# EAGLE board Mergen Ground Station_V2.0 (EAGLE 9.6.2)
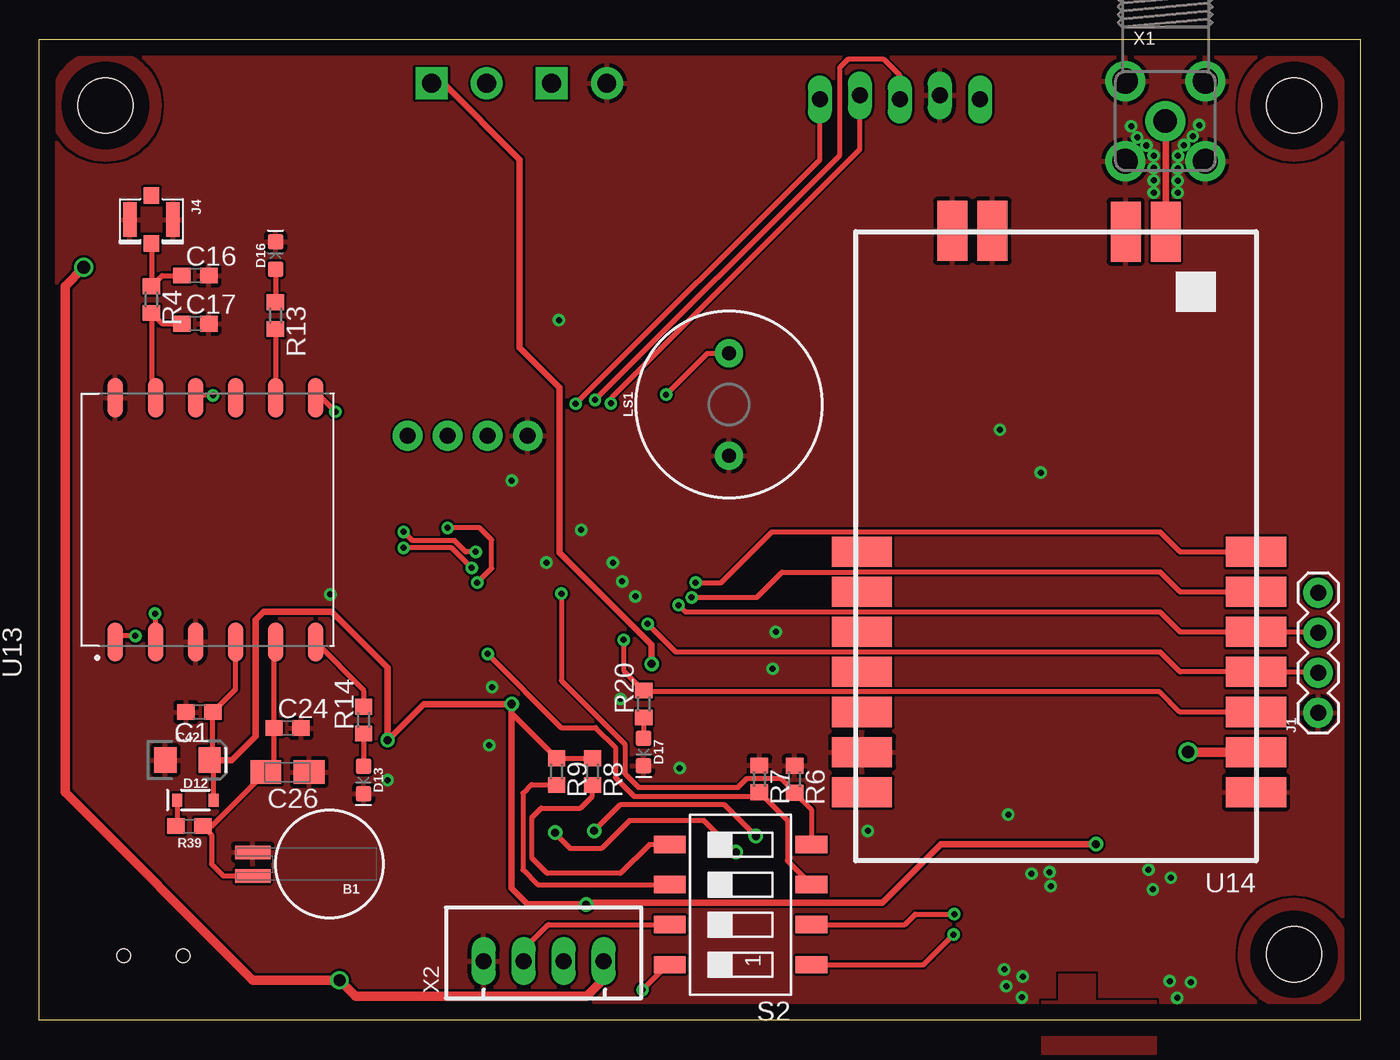
[diagram p0: board, top side]
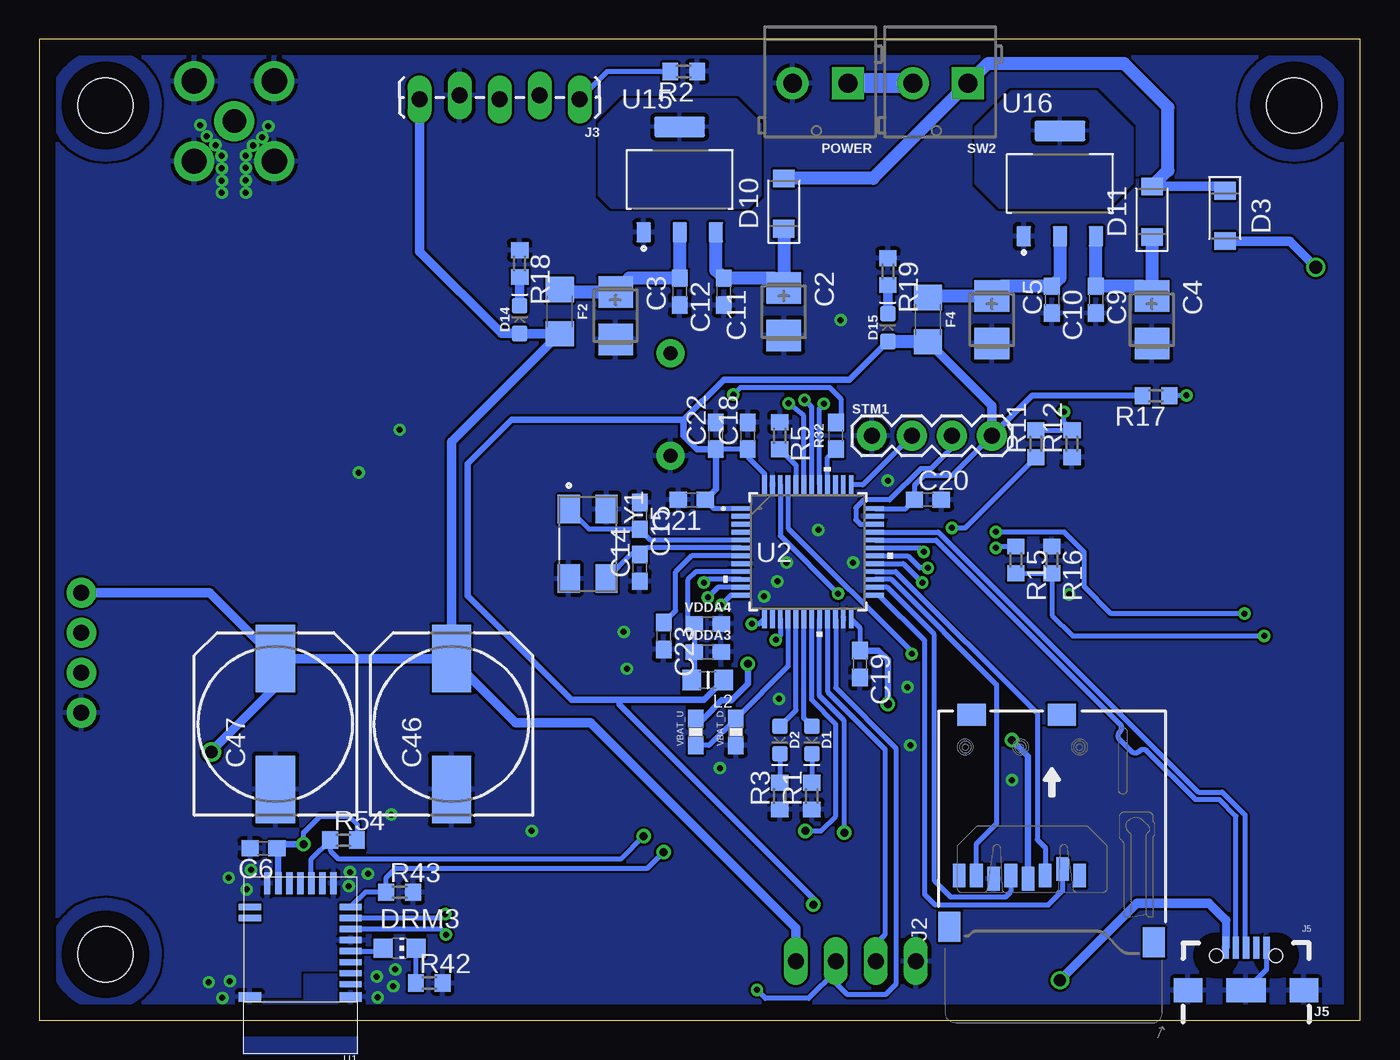
[diagram p1: board, bottom side, seen from below]

Size 83.82 x 62.23 mm. Coordinates in mm from the lower left corner, seen from the top.
Outline: 0,62.23 83.82,62.23 83.82,0 0,0 0,62.23
Copper layers (1*16): Top 0.035mm / dielectric 1.5mm / Bottom 0.035mm
Design rules "default": minimum track width 6mil, minimum drill 0.35mm, track to track 6mil, track to pad 6mil, pad to pad 6mil, via to via 6mil, smd to smd 6mil, copper to edge 40mil, drill to drill 6mil, minimum pad ring 10mil, minimum via ring 8mil, stop-mask expansion 4mil, vias tented up to drill 0mil, thermal gap 10mil
Holes 3.5 mm at 4.19,58.04 79.63,58.04 79.63,4.19

## Footprints (pad centres in the part's own frame; a part is rotated, then mirrored left to right if it is on the bottom)
BATTCON-6.8MM = smd 2.25 x 0.85: + 4.87,0.75; - 4.87,-0.75
C0603 = smd 1.1 x 1: 1 -0.85,0; 2 0.85,0
CT3528 = smd 2 x 2.2: + -1.5,0; - 1.5,0
A/3216-18R = smd 1.95 x 1.5: + 1.375,0; - -1.375,0
EIA3216 = smd 1.4 x 1.6: + 1.4,0; - -1.4,0
150CLZ-1010 = smd 4.3 x 2.5: + 4.15,0; - -4.15,0
LED-0603 = smd 1 x 1: A -0.877,0; C 0.877,0
SODFL3718X115 = smd 1.115 x 1.361: 1 -1.6,0; 2 1.6,0
SOD-323 = smd 0.63 x 0.83: A 1.15,0; C -1.15,0
CHIP-LED0805 = smd 1.2 x 1.2: A 0,-1.05; C 0,1.05
1206 = smd 1.6 x 1.8: 1 -1.4,0; 2 1.4,0
1X04 = drill 1.016 pad 1.88: 1 0,0; 2 2.54,0; 3 5.08,0; 4 7.62,0
CON-SD-CARD_2908-05 = smd 0.8 x 1.5: 1 1.761,3.847; 2 0.669,4.253; 3 -0.423,3.847; 4 -1.515,3.644; 5 -2.607,3.847; 6 -3.7,3.644; 7 -4.792,3.847; 8 -5.884,3.847 | smd 1.397 x 1.905: GND@1 -6.5,0.6; GND@2 6.473,-0.389 | smd 1.803 x 1.397: GND@3 0.631,14.059; GND@4 -5.084,14.059
1X05_LOCK_LONGPADS = drill 1.016 long: 1 0,0; 2 2.54,-0.254; 3 5.08,0; 4 7.62,-0.254; 5 10.16,0
U.FL = smd 2.2 x 0.85: 1 0,1.375; 2 0,-1.375 | smd 1.05 x 1: FEED 1.525,0; NC -1.525,0
USB-AB-MICRO-SMD = smd 1.4 x 0.4: D+1 2.7,0; D-1 2.7,0.65; GND1 2.7,-1.3; ID1 2.7,-0.65; VBUS1 2.7,1.3 | smd 1.5 x 1.8: SHLD1 0,-3.68; SHLD2 0,3.68 | smd 1.5 x 2.5: SHLD3 0,0 | hole 0.85: 2.2,1.9; 2.2,-1.9
RC-MASTER-SMD_L0805MP = smd 1.2 x 1.3: 1 -1.016,0; 2 1.016,0
BUZZER-12MM = drill 0.9 pad 1.778: + 3.25,0; - -3.25,0
SCREWTERMINAL-3.5MM-2-NS = drill 1.2 pad 2.032 square: 1 0,0 | drill 1.2 pad 2.032: 2 3.5,0
R0603 = smd 1 x 1.1: 1 -0.85,0; 2 0.85,0
0603 = smd 1.1 x 1: 1 -0.85,0; 2 0.85,0
SMS-004 = smd 1.092 x 2.007: 1 -3.81,-4.496; 2 -1.27,-4.496; 3 1.27,-4.496; 4 3.81,-4.496; 5 3.81,4.496; 6 1.27,4.496; 7 -1.27,4.496; 8 -3.81,4.496
MDBT42T-AT = smd 0.4 x 1.4: ADC -1.5,-4.7; CTS 0.6,-4.7; FLASH-D -0.8,-4.7; GND@1 -2.2,-4.7; GND@2 2,-4.7; RTS -0.1,-4.7; VDD 1.3,-4.7 | smd 1.4 x 0.4: DCC 3.1,-3.2; DEC4 3.1,-2.5; IND -3.3,-0.4; NC@0 -3.3,1.7; NC@1 -3.3,1; RESET -3.3,0.3; RX -3.3,-2.5; TX -3.3,-1.8; UART-PD -3.3,-3.2; WAKE-UP -3.3,-1.1 | smd 1.4 x 0.6: GND@0 -3.3,2.5; GND@3 3.1,2.5
LQFP48-7X7MM = smd 1.194 x 0.305: 1 -4.25,2.75; 2 -4.25,2.25; 3 -4.25,1.75; 4 -4.25,1.25; 5 -4.25,0.75; 6 -4.25,0.25; 7 -4.25,-0.25; 8 -4.25,-0.75; 9 -4.25,-1.25; 10 -4.25,-1.75; 11 -4.25,-2.25; 12 -4.25,-2.75; 25 4.25,-2.75; 26 4.25,-2.25; 27 4.25,-1.75; 28 4.25,-1.25; 29 4.25,-0.75; 30 4.25,-0.25; 31 4.25,0.25; 32 4.25,0.75; 33 4.25,1.25; 34 4.25,1.75; 35 4.25,2.25; 36 4.25,2.75 | smd 0.305 x 1.194: 13 -2.75,-4.25; 14 -2.25,-4.25; 15 -1.75,-4.25; 16 -1.25,-4.25; 17 -0.75,-4.25; 18 -0.25,-4.25; 19 0.25,-4.25; 20 0.75,-4.25; 21 1.25,-4.25; 22 1.75,-4.25; 23 2.25,-4.25; 24 2.75,-4.25; 37 2.75,4.25; 38 2.25,4.25; 39 1.75,4.25; 40 1.25,4.25; 41 0.75,4.25; 42 0.25,4.25; 43 -0.25,4.25; 44 -0.75,4.25; 45 -1.25,4.25; 46 -1.75,4.25; 47 -2.25,4.25; 48 -2.75,4.25
XCVR_L86 = smd 2.5 x 1: 1 -7.75,6.35; 2 -7.75,3.81; 3 -7.75,1.27; 4 -7.75,-1.27; 5 -7.75,-3.81; 6 -7.75,-6.35; 7 7.75,-6.35; 8 7.75,-3.81; 9 7.75,-1.27; 10 7.75,1.27; 11 7.75,3.81; 12 7.75,6.35
E32-868T30S = smd 3.81 x 1.905: 3V3 12.3,5.08; AUX -12.7,7.62; GND@0 -12.7,12.7; GND@1 12.3,10.16; M0 -12.7,-2.54; M1 -12.7,0; PB0 12.3,-2.54; PB1 12.3,0; PB3 12.3,2.54; RST 12.3,12.7; RX -12.7,2.54; SWIM 12.3,7.62; TX -12.7,5.08; VCC -12.7,10.16 | smd 1.905 x 3.81: ANT -6.97,-22.86; GND@2 6.57,-22.91; GND@3 4.03,-22.91; GND@4 -4.43,-22.86
SOT229P700X180-4N = smd 0.93 x 1.31: 1 -2.29,-3.345; 2 0,-3.345; 3 2.29,-3.345 | smd 3.24 x 1.31: 4 0,3.345
0603-RES = smd 1.1 x 1: 1 -0.85,0; 2 0.85,0
SMA90_DIP = drill 1.5 pad 2.54: ANTENNA 0,0 | drill 1.6 pad 2.54: GND1 -2.54,2.54; GND2 2.54,2.54; GND3 -2.54,-2.54; GND4 2.54,-2.54
JST-XH-04-PACKAGE-LONG-PAD = drill 1.016 long: 1 -3.81,0; 2 -1.27,0; 3 1.27,0; 4 3.81,0
XTAL_ABMM2-8.000MHZ-E2-T = smd 1.8 x 1.4: 1 -2.2,-1.2; 2 2.2,-1.2; 3 2.2,1.2; 4 -2.2,1.2

## Placement (x,y rotation side)
B1  6.8MM_COIN_CELL  [BATTCON-6.8MM]  18.41,9.91 180 top
C1  100nF  [C0603]  10.16,19.56 180 top
C2  22uF  [CT3528]  36.58,44.96 270 bottom
C3  22uF  [CT3528]  47.24,44.7 270 bottom
C4  22uF  [CT3528]  13.21,44.45 270 bottom
C5  22uF  [CT3528]  23.37,44.45 270 bottom
C6  100nF  [C0603]  69.6,10.92 180 bottom
C9  100nF  [C0603]  16.76,45.72 270 bottom
C10  100nF  [C0603]  19.56,45.72 270 bottom
C11  100nF  [C0603]  40.39,46.23 270 bottom
C12  100nF  [C0603]  43.18,46.23 270 bottom
C14  15pF  [C0603]  45.72,28.7 90 bottom
C15  15pF  [C0603]  45.72,32 270 bottom
C16  0.1uF  [C0603]  9.91,47.24 0 top
C17  0.1uF  [C0603]  9.91,44.2 0 top
C18  100nF  [C0603]  38.86,37.08 90 bottom
C19  100nF  [C0603]  31.75,22.61 270 bottom
C20  100nF  [C0603]  27.43,33.02 0 bottom
C21  100nF  [C0603]  42.42,33.02 180 bottom
C22  4.7uF  [C0603]  40.89,37.08 90 bottom
C23  0.1uF  [C0603]  44.2,24.38 270 bottom
C24  100nF  [C0603]  15.75,18.54 0 top
C26  4.7uF  [A/3216-18R]  15.75,15.75 180 top
C42  10uF  [EIA3216]  9.4,16.51 0 top
C46  1000uF  [150CLZ-1010]  57.66,18.8 90 bottom
C47  1000uF  [150CLZ-1010]  68.83,18.8 90 bottom
D1  BLUE  [LED-0603]  34.8,17.78 270 bottom
D2  GREEN  [LED-0603]  36.83,17.78 270 bottom
D3  B5819W  [SODFL3718X115]  8.59,51.03 270 bottom
D10  B5819W  [SODFL3718X115]  36.58,51.82 90 bottom
D11  B5819W  [SODFL3718X115]  13.21,51.31 90 bottom
D12  0.5A/40V/420mV  [SOD-323]  9.91,13.97 0 top
D13  [LED-0603]  20.57,15.24 270 top
D14  [LED-0603]  53.34,44.45 90 bottom
D15  [LED-0603]  29.97,43.94 90 bottom
D16  [LED-0603]  14.99,48.51 90 top
D17  [LED-0603]  38.35,17.02 270 top
DRM3  kirmizi  [CHIP-LED0805]  60.96,4.57 270 bottom
F2  1A  [1206]  50.8,44.96 270 bottom
F4  0.75A  [1206]  27.43,44.45 270 bottom
J1  [1X04]  81.15,19.51 90 top
J2  CON-SD-CARD_MICROSD-2908-05  [CON-SD-CARD_2908-05]  19.56,5.33 0 bottom
J3  [1X05_LOCK_LONGPADS]  49.53,58.42 180 bottom
J4  U.FL  [U.FL]  7.11,50.8 270 top
J5  [USB-AB-MICRO-SMD]  7.24,1.9 90 bottom
L2  [RC-MASTER-SMD_L0805MP]  41.4,21.59 180 bottom
LS1  BUZZER-PTH  [BUZZER-12MM]  43.76,39.07 90 top
POWER  [SCREWTERMINAL-3.5MM-2-NS]  32.51,59.44 180 bottom
R1  1.5k  [R0603]  34.8,14.22 90 bottom
R2  10k  [R0603]  42.93,60.2 180 bottom
R3  1.5k  [R0603]  36.83,14.22 90 bottom
R4  0  [R0603]  7.11,45.72 270 top
R5  10k  [R0603]  36.83,37.08 270 bottom
R6  10k  [R0603]  47.93,15.29 270 top
R7  10k  [R0603]  45.69,15.32 270 top
R8  330  [R0603]  35.1,15.77 270 top
R9  330  [R0603]  32.82,15.77 270 top
R11  680  [R0603]  20.57,36.58 90 bottom
R12  10k  [R0603]  18.29,36.58 90 bottom
R13  100  [R0603]  14.99,44.7 270 top
R14  470  [R0603]  20.57,19.05 90 top
R15  680  [R0603]  21.84,29.21 270 bottom
R16  10k  [R0603]  19.56,29.21 270 bottom
R17  10k  [R0603]  12.95,39.62 180 bottom
R18  1.5k  [R0603]  53.34,48.01 270 bottom
R19  1k  [R0603]  29.97,47.5 270 bottom
R20  3.3k  [R0603]  38.35,20.07 90 top
R32  47  [0603]  33.27,37.08 90 bottom
R39  1k  [0603]  9.53,12.32 180 top
R42  470  [R0603]  59.08,2.36 0 bottom
R43  10k  [R0603]  60.96,8.13 0 bottom
R54  10k  [R0603]  64.52,11.43 0 bottom
S2  SWS004  [SMS-004]  44.5,7.34 90 top
STM1  [1X04]  30.99,37.08 0 bottom
SW2  [SCREWTERMINAL-3.5MM-2-NS]  24.89,59.44 180 bottom
U1  [MDBT42T-AT]  67.36,3.99 180 bottom
U2  [LQFP48-7X7MM]  35.05,29.72 0 bottom
U13  L86  [XCVR_L86]  11.18,31.75 90 top
U14  [E32-868T30S]  64.52,27.18 180 top
U15  AMS1117-5V  [SOT229P700X180-4N]  43.18,53.34 0 bottom
U16  AMS1117-3.3  [SOT229P700X180-4N]  19.05,53.09 0 bottom
VBAT_D  3.3k  [0603-RES]  39.62,18.29 90 bottom
VBAT_U  10k  [0603-RES]  42.16,18.29 90 bottom
VDDA3  1uF  [0603]  41.4,23.37 0 bottom
VDDA4  10nF  [0603]  41.4,25.15 0 bottom
X1  [SMA90_DIP]  71.45,57.05 0 top
X2  JST-XH-04-PIN-LONG-PAD  [JST-XH-04-PACKAGE-LONG-PAD]  32,3.76 0 top
Y1  ABMM2-8.000MHZ-E2-T  [XTAL_ABMM2-8.000MHZ-E2-T]  49.02,30.23 270 bottom

## Library data of the parts
B1 = SparkFun-Batteries; PROD_ID: BATT-13734
C1-C6 C9-C12 C14-C24 C26 = rcl; SPICEPREFIX: C
C42 = SparkFun-Capacitors; PROD_ID: CAP-00811
C46 C47 X1 = adafruit
D1 D2 D13-D17 = SparkFun-LED
D3 D10 D11 = Diode; CATEGORY: Diode; DESCRIPTION: DIODE SCHOTTKY 20V 500MA SOD123; MANUFACTURER: ON Semiconductor; MPN: MBR0520LT1G; SUB-CATEGORY: Schottky
D12 = SparkFun-DiscreteSemi; PROD_ID: DIO-10955
DRM3 = led
F2 F4 = SparkFun-Fuses; PROD_ID: RES-08585
J1 STM1 = SparkFun-Connectors; PROD_ID: CONN-09696
J2 L2 = 52101-101-REV-A_v16
J3 = SparkFun-Connectors
J4 = SparkFun-Connectors; PROD_ID: CONN-09193; SF_ID: WRL-09144
J5 = SparkFun-Connectors; PROD_ID: CONN-11794
LS1 = SparkFun-Electromechanical; PROD_ID: COMP-08253; SF_SKU: COM-07950
POWER SW2 = SparkFun-Connectors; PROD_ID: CONN-08399
R1-R5 R11-R20 = rcl; SPICEPREFIX: R
R6-R9 R42 R43 R54 = rcl
R32 = SparkFun-Resistors; PROD_ID: RES-08609
R39 = SparkFun-Resistors; PROD_ID: RES-07856
S2 = smd-special
U1 = ELTASSAN; COMPONENT: MODULE BLUETOOTH BT4.2/5 nRF52805 SOC CHIP ANTENNA; OZDISAN_NO: MDBT42T-AT
U2 = STM32F103C8T6; BUILT_BY: EMA_UL_Team; COPYRIGHT: Copyright (C) 2018 Accelerated Designs. All rights reserved; MANUFACTURER_PART_NUMBER: STM32F103C8T6; SOURCELIBRARY: Updates_to_database_2020-10-19; VENDOR: STMicroelectronics
U13 = L86; AVAILABILITY: Unavailable; DESCRIPTION: L86 is an ultra-compact GNSS POT (Patch on Top) module with an embedded 18.4mm × 18.4mm × 4.0mm patch antenna and utilizes the MediaTek new generation GNSS chipset MT3333 that achieves the perfect performance; MF: Quectel; MP: L86; PACKAGE: PowerSFN-8 Quectel; PRICE: None
U14 = E32-868T30S
U15 U16 = AMS1117-3.3; AVAILABILITY: Unavailable; DESCRIPTION: Sot223/Pkg 1-Amp 3.3-Volt Low Drop Out Voltage Regulatator; MF: Advanced Monolithic Systems; MP: AMS1117-3.3; PACKAGE: SOT-89 ams; PRICE: None
VBAT_D VBAT_U = SparkFun-Resistors; PROD_ID: RES-08296
VDDA3 VDDA4 = SparkFun-Capacitors; PROD_ID: CAP-00810
X2 = Rembrandt Electronics - JST XH Connectors v1-0
Y1 = ABMM2-8.000MHZ-E2-T (1); AVAILABILITY: Good; DESCRIPTION: 8MHz ±20ppm Crystal 18pF 72 Ohms 4-SMD, No Lead; MF: Abracon; MP: ABMM2-8.000MHZ-E2-T; PACKAGE: SMD-4 Abracon; PRICE: None; PURCHASE-URL: https://pricing.snapeda.com/search/part/ABMM2-8.000MHZ-E2-T/?ref=eda

## Nets
3.3V: C1.1 C6.1 C18.1 C19.1 C20.1 C21.1 C22.1 C42.+ D12.A D15.A F4.2 J2.4 L2.1 R8.1 R9.1 R17.2 R54.2 STM1.4 U1.VDD U2.1 U2.24 U2.36 U2.48 U13.4
5V: C46.+ C47.+ D3.2 D14.A F2.2 J1.4 J3.5 J5.VBUS1 U14.VCC X2.4
AUX: R20.2 U2.15 U14.AUX
B1: R7.2 S2.3 U2.45
B2: R6.2 S2.4 U2.46
BT0: R5.2 U2.44
BZZR: R32.1 U2.40
CS: J2.2 U2.25
DRDY: J3.1 R2.2 U2.41
FLASH-D: R54.1 U1.FLASH-D U2.19
FN: R11.1 U2.29
GND: B1.- C1.2 C2.- C3.- C4.- C5.- C6.2 C9.2 C10.2 C11.2 C12.2 C14.1 C15.1 C16.2 C17.2 C18.2 C19.2 C20.2 C21.2 C22.2 C23.2 C24.2 C26.- C42.- C46.- C47.- D13.C D16.C D17.C J1.1 J2.6 J3.4 J4.1 J4.2 J5.GND1 J5.SHLD1 J5.SHLD2 J5.SHLD3 LS1.- POWER.2 R1.1 R2.1 R3.1 R5.1 R6.1 R7.1 R12.1 R16.1 R18.1 R19.1 R42.2 R43.2 STM1.1 U1.GND@0 U1.GND@1 U1.GND@2 U1.GND@3 U1.WAKE-UP U2.8 U2.23 U2.35 U2.47 U13.3 U13.12 U14.GND@0 U14.GND@1 U14.GND@2 U14.GND@3 U14.GND@4 U15.1 U16.1 VBAT_D.1 VDDA3.2 VDDA4.2 X1.GND1 X1.GND2 X1.GND3 X1.GND4 X2.1 Y1.2 Y1.4
HT: U15.4
HT2: U16.4
LED: D1.A U2.18
LED2: D2.A U2.17
M0: U2.10 U14.M0
M1: U2.11 U14.M1
MISO: J2.7 U2.27
MOSI: J2.3 U2.28
N$1: D1.C R1.2
N$2: D16.A R13.1
N$3: D2.C R3.2
N$4: LS1.+ R32.2
N$5: DRM3.A U1.IND
N$6: DRM3.C R42.1
N$7: R9.2 S2.6
N$8: R8.2 S2.5
N$22: C2.+ C11.1 D10.1 U15.3
N$23: C3.+ C12.1 F2.1 U15.2
N$24: C4.+ C9.1 D11.1 U16.3
N$25: C5.+ C10.1 F4.1 U16.2
N$27: U14.ANT X1.ANTENNA
N$30: POWER.1 SW2.2
N$31: D12.C R39.2
N$32: R17.1 U13.10
N$33: R14.2 U13.6
N$34: D13.A R14.1
N$35: D14.C R18.2
N$36: D15.C R19.2
N$37: R13.2 U13.8
N$39: C16.1 J4.FEED R4.1
N$40: R11.2 R12.2 U13.7
N$41: D17.A R20.1
NRST: C23.1 U2.7
OSC_IN: C15.2 U2.5 Y1.1
OSC_OUT: C14.2 U2.6 Y1.3
RX1: U2.31 U13.2
RX2: J1.2 U2.13 U14.TX
RX3: S2.8 U2.22 X2.3
RX3D: S2.1 U1.TX
SCK: J2.5 U2.26
SCL: J3.3 U2.42
SDA: J3.2 U2.43
SWCLK: STM1.2 U2.37
SWDIO: STM1.3 U2.34
TX1: R15.1 U2.30
TX2: J1.3 U2.12 U14.RX
TX3: S2.7 U2.21 X2.2
TX3D: S2.2 U1.RX
TXD: R15.2 R16.2 U13.1
UART-PD: R43.1 U1.UART-PD U2.20
USB_N: J5.D-1 U2.32
USB_P: J5.D+1 U2.33
V_BCKP: B1.+ C24.1 C26.+ R39.1 U13.5
VB: U2.16 VBAT_D.2 VBAT_U.1
VCC: D3.1 D10.2 D11.2 SW2.1 VBAT_U.2
VDDA: L2.2 U2.9 VDDA3.1 VDDA4.1
XANT: C17.1 R4.2 U13.11

## Tracks (layer width: path | path; a pad name or v marks a point on that pad's centre or on a via)
3.3V  (via drill 0.51)
  Top 0.305: U13.4 12.45,20.99 C1.1 11.01,16.72 C42.+ 11.06,16.25 D12.A | v29.97,20.07 29.97,19.47 R9.1 R8.1
  Top 0.406: C42.+ 12.19,16.51 13.72,18.03 13.72,25.4 14.22,25.91 18.54,25.91 22.1,22.35 v22.1,17.78 24.38,20.07 v29.97,20.07 29.97,8.38 30.99,7.37 34.67,7.37 v34.7,7.34 34.82,7.47 53.49,7.47 57.2,11.18 v67.06,11.18
  Bottom 0.305: U2.36 28.83,32.47 C20.1 28.28,33.95 27.69,34.54 25.91,34.54 STM1.4 | U2.48 37.8,34.67 38.86,35.73 C18.1 C22.1 | U2.1 41.02,32.47 C21.1 | U2.24 31.75,24.92 C19.1 | v67.06,11.18 67.06,11.91 66.02,12.95 64.16,12.95 63.67,12.46 R54.2
  Bottom 0.381: R17.2 20.83,39.62 STM1.4
  Bottom 0.406: D15.A 32.4,40.64 40.39,40.64 42.93,38.1 | 42.93,38.1 42.93,37.08 42.08,36.23 C22.1 40.89,33.69 C21.1 | 42.93,38.1 53.85,38.1 56.64,35.31 56.64,26.92 50.04,20.32 46.99,20.32 | 46.99,20.32 41.66,20.32 L2.1 | 46.99,20.32 46.99,20.02 34.7,7.72 v34.7,7.34 | v29.97,20.07 29.97,22.86 30.57,23.46 C19.1 | v22.1,17.78 21.07,16.75 J2.4 | v67.06,11.18 68.49,11.18 C6.1 68.66,10.84 U1.VDD
  Bottom 0.61: STM1.4 23.37,38.99 F4.2
  Bottom 0.813: F4.2 29.96,43.05 D15.A
5V  (via drill 0.76, 0.81)
  Top 0.61: U14.VCC v72.9,17.02 | X2.4 35.81,2.62 34.72,1.52 20.07,1.52 v19.05,2.54 13.54,2.54 1.63,14.45 1.63,46.58 v2.82,47.78
  Bottom 0.508: 8.54,6.35 J5.VBUS1
  Bottom 0.61: C46.+ 57.66,36.7 F2.2 53.33,43.56 D14.A 54.5,43.57 59.69,48.77 J3.5 | C47.+ C46.+ | v72.9,17.02 72.9,17.1 68.83,21.17 C47.+ | C46.+ 53.59,18.88 48.85,18.88 35.81,5.84 X2.4 | v19.05,2.54 14.17,7.42 9.61,7.42 8.54,6.35 | v2.82,47.78 4.47,49.43 D3.2 | C47.+ 73.02,27.13 J1.4
AUX  (via drill 0.38)
  Top 0.305: v37.08,24.13 37.08,22.19 R20.2 38.43,20.84 71.11,20.84 72.39,19.56 U14.AUX
  Bottom 0.305: U2.15 36.8,24.41 v37.08,24.13
B1  (via drill 0.38)
  Top 0.305: S2.3 47.47,10.13 47.47,12.69 R7.2 45.43,14.2 37.74,14.2 36.55,15.39 36.55,17.32 35.31,18.57 33.12,18.57 v28.45,23.24
  Bottom 0.305: U2.45 36.3,31.22 28.45,23.37 v28.45,23.24
B2  (via drill 0.38)
  Top 0.305: S2.4 49,13.37 R6.2 47.03,15.34 44.91,15.34 44.35,14.78 38.02,14.78 37.16,15.65 37.16,17.53 33.13,21.55 v33.13,27.07
  Bottom 0.305: U2.46 36.8,30.73 v33.13,27.07
BT0
  Bottom 0.305: R5.2 35.8,35.21 U2.44
BZZR
  Bottom 0.305: U2.40 33.8,35.71 R32.1
CS
  Bottom 0.305: J2.2 18.89,8.2 19.78,7.31 26.97,7.31 27.63,7.98 27.63,24.08 30.52,26.97 U2.25
D1
  pour Top: 83.13,58.04 arc-90 79.6,54.53 arc-90 76.12,58.06 arc-90 79.63,61.54 arc-90
  pour Bottom: 76.12,58.01 arc90 79.6,54.53 arc90 83.13,58.06 arc90 79.58,61.54 arc90
D2
  pour Top: 7.7,58.04 arc-90 4.17,54.53 arc-90 0.69,58.06 arc-90 4.19,61.54 arc-90
  pour Bottom: 0.69,58.01 arc90 4.17,54.53 arc90 7.7,58.06 arc90 4.14,61.54 arc90
D3
  pour Top: 83.13,4.19 arc-90 79.6,0.69 arc-90 76.12,4.22 arc-90 79.63,7.7 arc-90
  pour Bottom: 76.12,4.17 arc90 79.6,0.69 arc90 83.13,4.22 arc90 79.58,7.7 arc90
DRDY  (via drill 0.38)
  Top 0.305: J3.1 49.53,54.61 v34.04,39.12
  Bottom 0.305: J3.1 47.75,60.2 R2.2 | U2.41 34.3,38.85 v34.04,39.12
FLASH-D  (via drill 0.51)
  Top 0.305: v45.47,11.68 43.48,13.66 36.86,13.66 v35.2,12.01
  Bottom 0.305: U1.FLASH-D 66.56,10.23 R54.1 65.37,10.76 64.87,10.26 46.89,10.26 v45.47,11.68 | v35.2,12.01 34.21,12.01 33.27,12.95 33.27,18.8 34.8,20.32 U2.19
FN  (via drill 0.38)
  Top 0.305: v27.79,27.76 28.7,28.67 28.7,30.48 27.94,31.24 v25.91,31.24
  Bottom 0.305: U2.29 29,28.97 v27.79,27.76 | v25.91,31.24 25.06,31.24 R11.1
GND  (via drill 0.38)
  Bottom 0.305: J5.GND1 5.94,3.21 J5.SHLD3
  other vias: 46.74,24.64 40.64,16 22.1,15.24 70.71,52.5 70.71,53.29 70.71,54.08 70.71,54.86 70.26,55.5 72.24,52.5 72.24,53.26 72.24,54.05 72.26,54.84 72.64,55.52 73.2,56.08 69.67,56.01 69.29,56.72 73.61,56.79 64.11,9.4 62.97,9.3 64.19,8.51 70.38,9.55 70.66,8.31 71.81,9.04 71.73,2.49 72.21,1.42 73.08,2.41 62.36,1.45 62.41,2.77 61.37,2.16 61.24,3.23 46.53,22.3 36.98,27.84 36.4,29.03 37.82,26.9 52.58,12.01 63.55,34.75 60.96,37.46 61.49,13.06 32.97,44.42 28.55,17.45 28.73,21.13 32.18,29.03 34.39,31.11 29.97,34.24 36.88,20.4 18.47,27.03
  pour Bottom (rank 2): -0.51,-0.51 -0.51,62.74 84.33,62.74 84.33,-0.51
  pour Top (rank 2): -1.02,-1.02 -1.02,63.25 84.84,63.25 84.84,-1.02
HT
  pour Bottom: 38.86,51.56 47.5,51.56 48.26,52.32 48.26,56.9 46.74,58.42 39.62,58.42 38.1,56.9 38.1,52.32
HT2
  pour Bottom: 16,51.56 22.86,51.56 24.38,53.09 24.38,56.64 22.1,58.93 16.76,58.93 14.48,56.64 14.48,53.09
LED
  Bottom 0.305: U2.18 35.3,19.16 D1.A
LED2
  Bottom 0.305: U2.17 35.8,19.68 D2.A
M0  (via drill 0.38)
  Top 0.305: v41.66,27.77 43.26,27.77 46.48,30.99 71.12,30.99 72.39,29.72 U14.M0
  Bottom 0.305: U2.10 41.46,27.97 v41.66,27.77
M1  (via drill 0.38)
  Top 0.305: v41.4,26.83 45.53,26.83 47.14,28.43 51.8,28.43 51.82,28.45 71.12,28.45 72.39,27.18 U14.M1
  Bottom 0.305: U2.11 40.76,27.47 v41.4,26.83
MISO
  Bottom 0.305: J2.7 24.35,11.21 23.08,12.48 23.08,21.3 29.75,27.97 U2.27
MOSI
  Bottom 0.305: U2.28 29.48,28.47 20.49,19.47 20.49,11.47 19.98,10.96 J2.3
N$1
  Bottom 0.305: D1.C R1.2
N$2
  Top 0.305: D16.A R13.1
N$3
  Bottom 0.305: D2.C R3.2
N$4  (via drill 0.38)
  Top 0.305: v39.78,39.7 42.39,42.31 LS1.+
  Bottom 0.305: R32.2 32.92,38.29 32.92,39.39 33.66,40.13 39.34,40.13 v39.78,39.7
N$5
  Bottom 0.305: U1.IND 62.19,4.39 DRM3.A
N$6
  Bottom 0.305: DRM3.C 59.93,4.55 R42.1
N$7
  Top 0.305: R9.2 31.28,14.92 31.24,14.96 30.7,14.41 30.7,9.54 31.62,8.61 S2.6
N$8
  Top 0.305: S2.5 38.71,11.15 36.88,9.32 32.23,9.32 31.27,10.29 31.27,12.88 31.85,13.46 34.34,13.46 35.1,14.22 R8.2
N$22
  Bottom 0.813: D10.1 C2.+ 37.2,47.08 C11.1 40.89,47.58 U15.3
N$23
  Bottom 0.813: U15.2 C12.1 46.37,47.08 C3.+ 50.65,46.2 F2.1
N$24
  Bottom 0.813: D11.1 C4.+ 13.83,46.57 C9.1 U16.3
N$25
  Bottom 0.813: U16.2 19.05,47.08 C10.1 22.75,46.57 C5.+ 27.33,45.95 F4.1
N$27
  Top 0.406: X1.ANTENNA 71.49,57.01 U14.ANT
N$30
  Bottom 1.27: SW2.2 POWER.1
N$31
  Top 0.305: D12.C 8.76,12.4 R39.2
N$32  (via drill 0.38)
  Top 0.305: v11.02,39.65 10.05,39.65 U13.10
  Bottom 0.305: R17.1 12.08,39.65 v11.02,39.65
N$33
  Top 0.305: U13.6 20.57,20.95 R14.2
N$34
  Top 0.305: R14.1 D13.A
N$35
  Bottom 0.61: D14.C R18.2
N$36
  Bottom 0.61: D15.C R19.2
N$37
  Top 0.305: R13.2 U13.8
N$39
  Top 0.305: J4.FEED R4.1 7.79,47.24 C16.1
N$40  (via drill 0.38)
  Top 0.305: v18.8,38.61 17.9,39.5 U13.7
  Bottom 0.305: v18.8,38.61 18.8,37.93 R12.2 R11.2
N$41
  Top 0.305: R20.1 D17.A
NGND
  pour Bottom: 64.74,2.9 66.98,2.9 66.98,1.19 70.87,1.19 70.87,-2.11 63.65,-2.11 63.65,1.17 64.74,1.17
  pour Top: 64.74,2.9 66.98,2.9 66.98,1.19 70.87,1.19 70.87,-2.11 63.65,-2.11 63.65,1.17 64.74,1.17
NRST
  Bottom 0.305: U2.7 42.42,29.46 43.43,28.45 43.43,26 C23.1
OSC_IN
  Bottom 0.305: Y1.1 48.95,31.15 C15.2 45.03,30.47 U2.5
OSC_OUT
  Bottom 0.305: Y1.3 46.3,29.55 C14.2 45.3,29.97 U2.6
RX1  (via drill 0.38)
  Top 0.305: v7.34,25.81 7.34,24.02 U13.2 | v27.69,29.72 27.06,29.72 26.35,30.43 23.67,30.43 v23.11,30.99
  Bottom 0.305: U2.31 27.94,29.97 v27.69,29.72 | v23.11,30.99 18.8,30.99 17.51,29.7 17.51,27.5 15.82,25.81 v7.34,25.81
RX2  (via drill 0.38)
  Top 0.305: v38.61,25.15 40.39,23.37 71.12,23.37 72.39,22.1 U14.TX 81.1,22.1 J1.2
  Bottom 0.305: U2.13 38.12,25.15 v38.61,25.15
RX3  (via drill 0.38)
  Top 0.305: v38.28,1.93 39.88,3.53 S2.8
  Bottom 0.305: U2.22 33.27,25.44 33.27,21.08 29.46,17.27 29.46,2.29 30.12,1.63 32.54,1.63 33.27,2.36 X2.3 33.27,3.12 35,1.4 37.74,1.4 v38.28,1.93
RX3D  (via drill 0.38)
  Top 0.305: v58.01,5.44 56.68,4.1 56.57,3.99 56.11,3.53 S2.1
  Bottom 0.305: v58.01,5.44 58.01,5.49 58.32,5.79 U1.TX
SCK
  Bottom 0.305: J2.5 22.16,8.16 22.5,7.83 26,7.83 27.03,8.86 27.03,24.49 30.01,27.47 U2.26
SCL  (via drill 0.38)
  Top 0.305: v35.27,39.36 50.8,54.89 50.8,60.45 51.31,60.96 53.59,60.96 54.61,59.94 J3.3
  Bottom 0.305: U2.42 34.8,38.89 v35.27,39.36
SDA  (via drill 0.38)
  Top 0.305: v36.27,39.14 36.27,39.45 36.4,39.6 52.07,55.27 J3.2
  Bottom 0.305: U2.43 35.3,38.35 v36.27,39.14
SWCLK
  Bottom 0.305: STM1.2 31.56,33.97 U2.37
SWDIO
  Bottom 0.305: STM1.3 25.91,36.32 27.23,35 27.88,35 29.86,33.02 31.5,33.02 32,32.51 32,31.75 31.72,31.47 U2.34
TX1  (via drill 0.38)
  Top 0.305: v27.43,28.7 26.16,29.97 v23.11,29.97
  Bottom 0.305: U2.30 28.71,29.47 27.94,28.7 v27.43,28.7 | v23.11,29.97 23.03,30.06 R15.1
TX2  (via drill 0.38)
  Top 0.305: v40.56,26.34 41,25.91 71.12,25.91 72.39,24.64 U14.RX 81.1,24.64 J1.3
  Bottom 0.305: U2.12 39.94,26.97 v40.56,26.34
TX3
  Top 0.305: X2.2 30.73,4.52 32.28,6.07 S2.7
  Bottom 0.305: U2.21 33.8,20.85 30.15,17.2 30.15,5.44 30.73,4.85 X2.2
TX3D  (via drill 0.38)
  Top 0.305: v58.06,6.73 55.58,6.73 54.92,6.07 S2.2
  Bottom 0.305: v58.06,6.73 58.31,6.49 U1.RX
TXD  (via drill 0.38)
  Top 0.305: v6.1,24.38 5.21,24.38 U13.1
  Bottom 0.305: R15.2 R16.2 19.56,25.7 18.24,24.38 v6.1,24.38
UART-PD  (via drill 0.51)
  Top 0.305: v44.2,10.67 42.19,12.67 37.44,12.67 35.66,10.9 33.71,10.9 32.74,11.86 v32.74,11.91
  Bottom 0.305: U1.UART-PD 63.12,8.13 R43.1 61.81,9.06 61.21,9.65 45.21,9.65 v44.2,10.67 | v32.74,11.91 32.77,11.91 32.77,19.05 34.3,20.59 U2.20
USB_N
  Bottom 0.305: U2.32 26.91,30.47 15.24,18.8 arc90 15.24,18.31 15.26,18.29 arc-90 15.26,17.8 14.51,17.06 arc-90 14.03,17.06 14.01,17.08 arc90 13.52,17.08 10.46,14.02 8.94,14.02 7.87,12.95 7.87,4.62 J5.D-1
USB_P
  Bottom 0.305: U2.33 26.76,30.97 10.28,14.48 8.75,14.48 7.29,13.02 7.29,4.66 J5.D+1
V_BCKP
  Top 0.305: B1.+ 11.67,9.16 10.92,9.91 10.92,11.77 R39.1 10.94,12.32 C26.+ 14.9,16.27 C24.1 14.9,23.91 U13.5
VB
  Bottom 0.305: U2.16 36.3,22.46 VBAT_D.2 41.32,17.44 VBAT_U.1
VCC  (via drill 0.51)
  Top 0.406: SW2.1 25.65,59.44 30.48,54.61 30.48,42.67 33.02,40.13 33.02,29.67 38.86,23.83 v38.86,22.61
  Bottom 0.406: v38.86,22.61 38.86,21.34 39.9,20.3 40.53,20.3 41.69,19.14 VBAT_U.2
  Bottom 0.61: D3.1 8.87,52.91 D11.2
  Bottom 0.813: D10.2 30.91,53.42 SW2.1 23.62,60.71 14.99,60.71 12.19,57.91 12.19,53.92 D11.2
VDDA
  Bottom 0.305: U2.9 42.14,28.47 42.67,27.94 42.67,25.57 VDDA4.1 VDDA3.1 42.25,21.76 L2.2
XANT
  Top 0.305: U13.11 7.11,39.75 R4.2 7.79,44.2 C17.1